# Altium PCB CH32V003F4P6-R0-1v1.PcbDoc
Units mil, origin at the board's own origin, x right, y up, seen from the top; angles counter-clockwise.
Board outline 1535.59 x 1780 mil, 2 copper layers (Top Layer, Bottom Layer); 31 components, 32 nets, 124 pads, 264 vias.
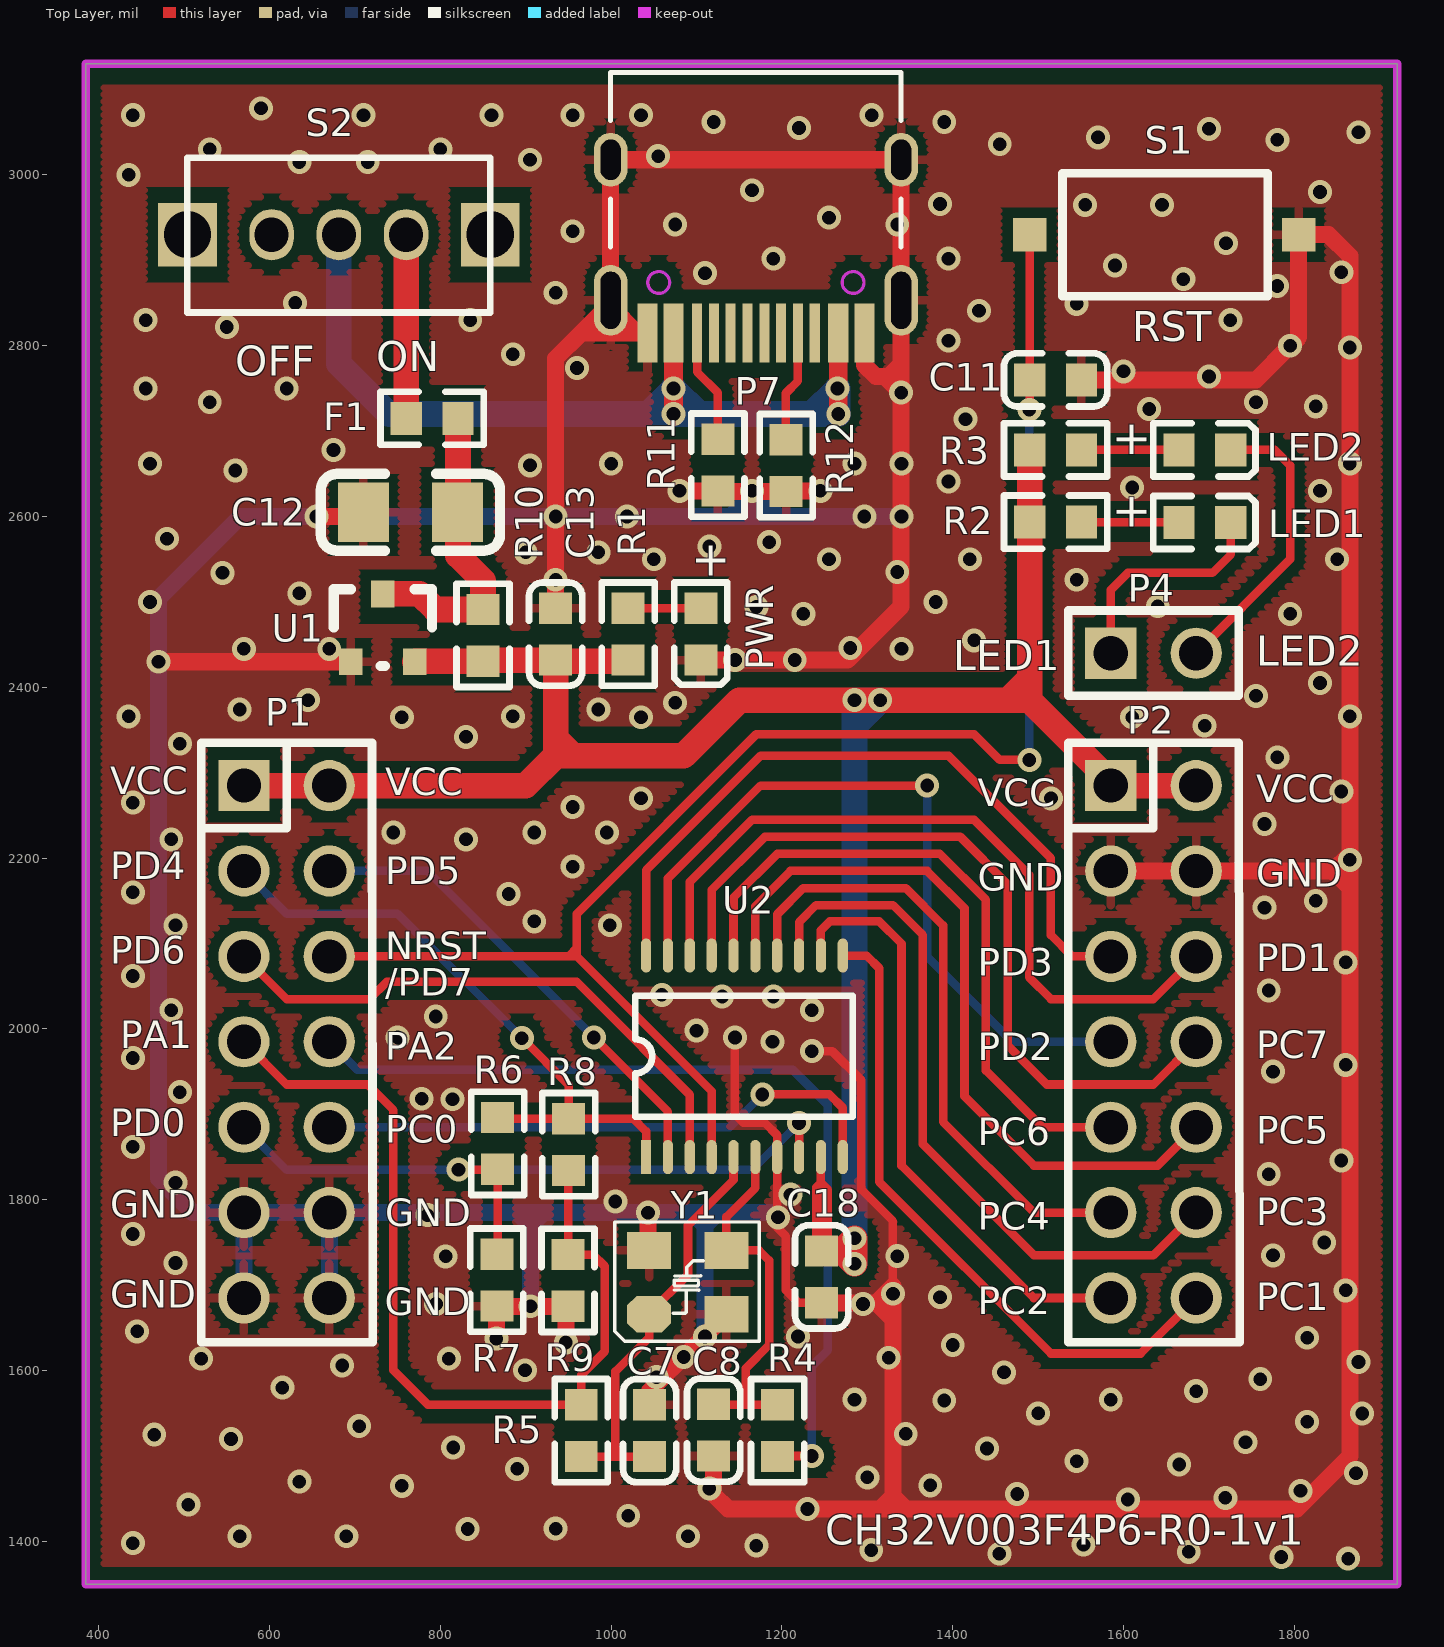
[diagram p0: Top Layer view]
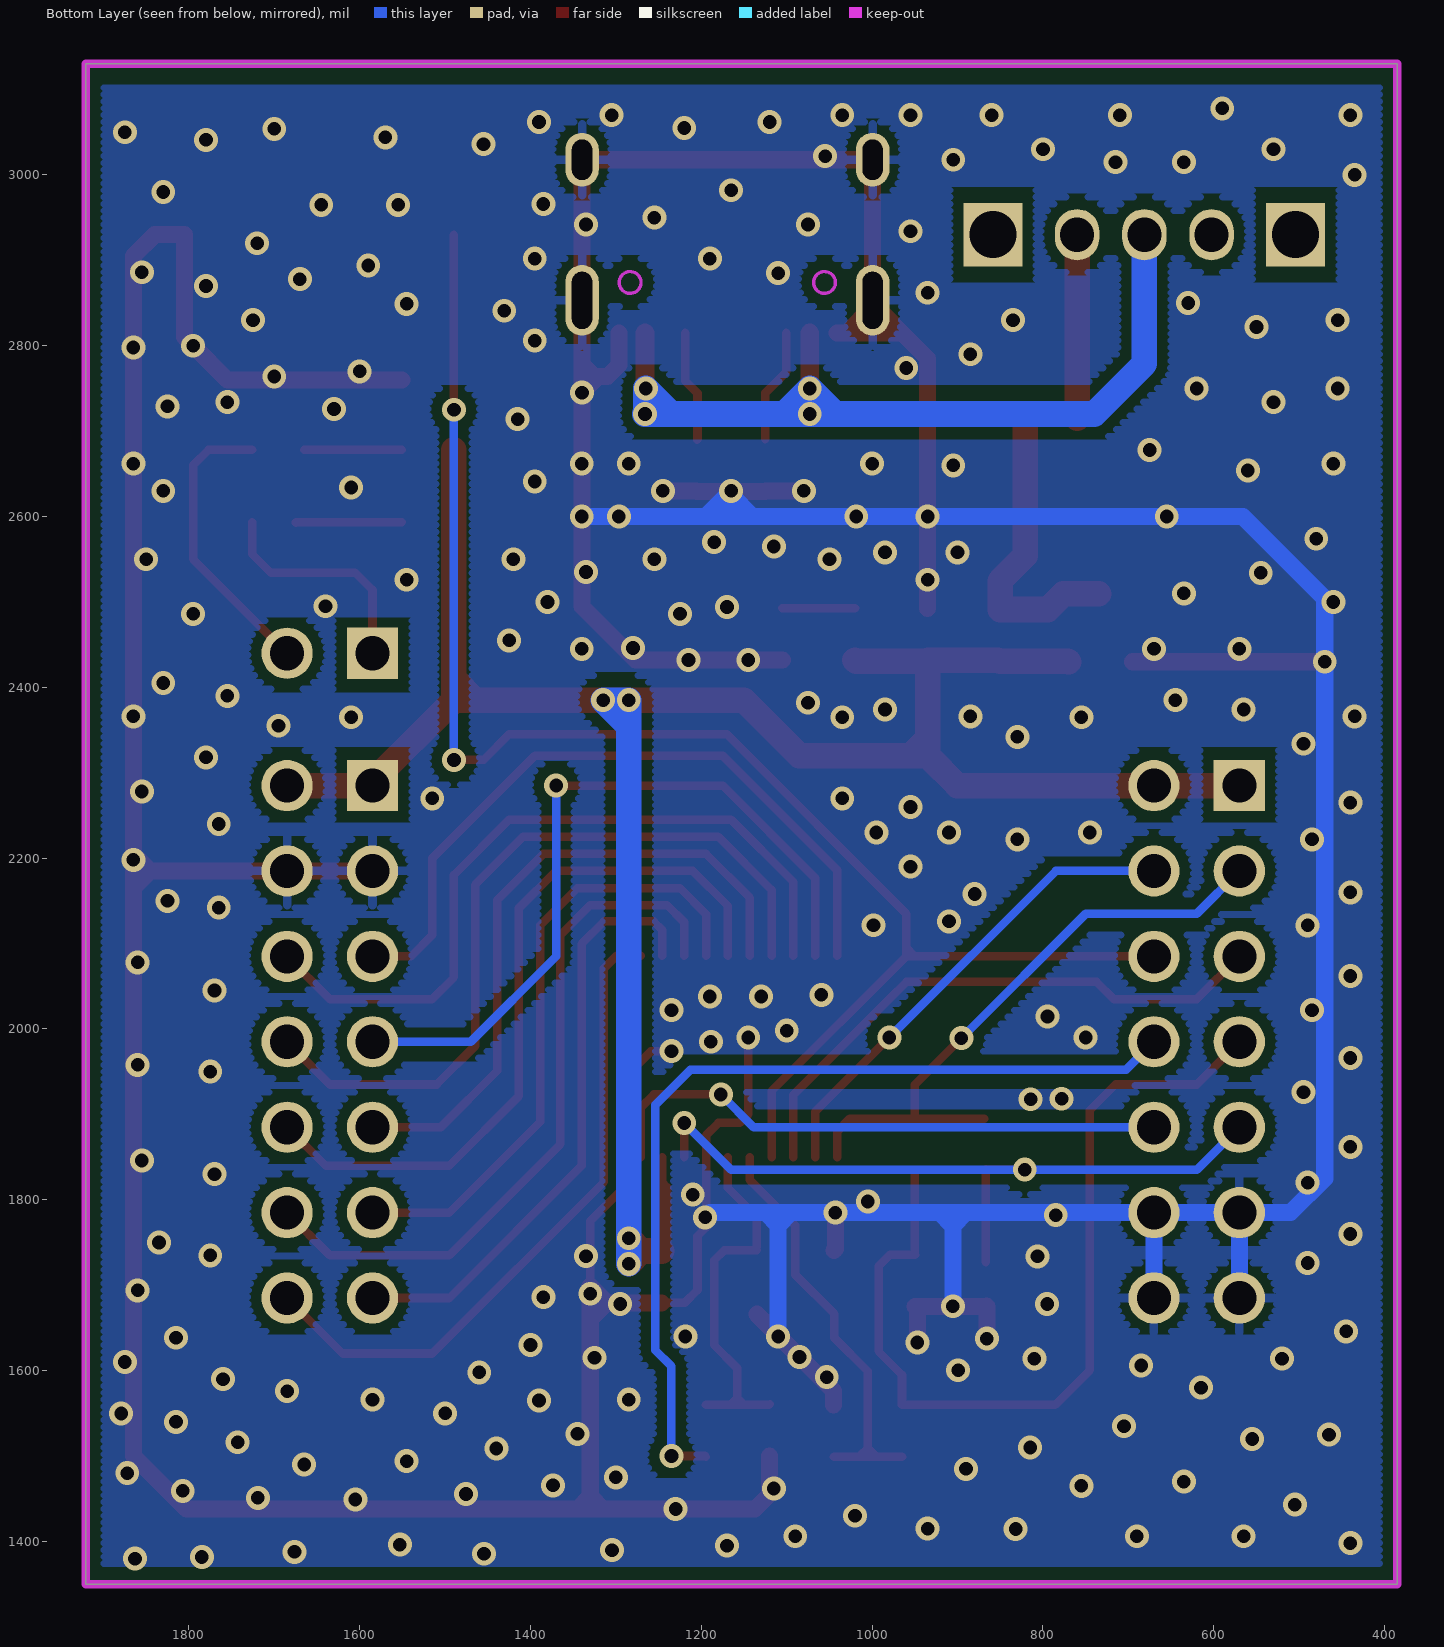
[diagram p1: Bottom Layer view, seen from below]

## Layer stack, top to bottom
Top Solder: solder mask 0.4, Solder Resist, Dk 3.5
Top Layer: signal copper 1.4
Dielectric 1: dielectric 12.6, FR-4, Dk 4.8
Bottom Layer: signal copper 1.4
Bottom Solder: solder mask 0.4, Solder Resist, Dk 3.5

## Board outline
385,1350 385,3130 1920.59,3130 1920.59,1350

## Design rules (kind name [scope] priority, off if disabled: settings)
Clearance Clearance_1 [InPolygon] p1: gap=12 ignorepadtopadclearanceinfootprint=FALSE
Clearance [All] p2: gap=6 ignorepadtopadclearanceinfootprint=FALSE
ComponentClearance [All] p1: gap=0 collisioncheckmode=3 verticalgap=0 showdistances=FALSE
DiffPairsRouting [All] p1: maxlimit=10 minlimit=6 mostfreqgap=8 toplayer_minwidth=6 toplayer_maxwidth=15 toplayer_prefwidth=8 bottomlayer_minwidth=6 bottomlayer_maxwidth=15 bottomlayer_prefwidth=8 maxuncoupledlength=500
PolygonConnect PolygonConnect_1 [IsVia] p1: connectstyle=Direct reliefconductorwidth=10 reliefentries=4 polygonreliefangle="90 Angle" airgapwidth=10
PolygonConnect [All] p2: connectstyle=Relief reliefconductorwidth=10 reliefentries=4 polygonreliefangle="90 Angle" airgapwidth=10
RoutingVias [All] p1: holewidth=16 width=28 viastyle="Through Hole" minholewidth=12 minwidth=24 maxholewidth=28 maxwidth=50
SolderMaskExpansion [All] p1: expansion=4 istentingtop=FALSE
Width [All] p1: maxlimit=100 minlimit=6 preferedwidth=10 minimp=50.000000 maximp=50.000000 favimp=50.000000
28 further rules are at their usual default settings.

## Components (designator, comment, footprint, x,y, rotation, side; value= is the part's Value field where it differs from the comment)
C7 "22pF" 0603_C 1045,1560 r270 top
C8 "22pF" 0603_C 1120,1500 r90 top
C11 "0.1uF" 0603_C 1550.63,2760 r180 top
C12 "10uF" 3216_C 820,2605 r0 top
C13 "2.2uF" 0603_C 935,2492.56 r270 top
C18 "0.1uF" 0603_C 1246.38,1679.37 r90 top value=15pF
F1 "500mA" 0603 760,2715 r0 top
LED1 "LED1   blue" 0603+ 1665,2593 r0 top
LED2 "LED2  blue" 0603+ 1665,2678 r0 top
P1 "Header 7X2" IDC14-2.54mm 570,2285 r0 top
P2 "Header 7X2" IDC14-2.54mm 1585,2285 r0 top locked
P4 "HEADER 2" SIP2-2.54mm 1585,2440 r270 top
P7 "TYPE-C" TYPE-C-Receptacle-2.0 1169.53,2815 r180 top
PWR "POWER  red" 0603+ 1105,2492.56 r270 top
R1 "1K" 0603 1020,2492.56 r270 top
R2 "1K" 0603 1490,2593.47 r0 top
R3 "1K" 0603 1490,2678 r0 top
R4 "0R" 0603 1195,1560 r270 top value=NC(0R)
R5 "0R" 0603 965,1499.37 r90 top value=NC(0R)
R6 "0R" 0603 867.18,1896.42 r270 top value=NC
R7 "0R" 0603 866.14,1736.18 r270 top value=NC
R8 "0R" 0603 950.34,1894.83 r270 top value=NC
R9 "0R" 0603 949.49,1735.85 r270 top value=NC
R10 "0R" 0603 850,2491.1 r270 top value=NC(0R)
R11 "0R" 0603 1125,2690.55 r270 top value=NC(5.1K)
R12 "0R" 0603 1205,2690 r270 top value=NC(5.1K)
S1 "NRST" SMD_6.1x3.65x2.5mm-KEY 1490.04,2930 r0 top
S2 "SW" SW1 681.26,2930 r0 top
U1 "6219P33M" SOT-23 695.2,2430 r0 top
U2 "CH32V003F4P6" TSSOP20 1040.9,1850 r0 top locked
Y1 "24MHz" XT3225 1044.45,1665.97 r0 top

## Footprints (in the part's own frame and the unit in brackets; to place one, negate y for a bottom-side part, rotate by r counter-clockwise, add the part's x,y. Pads: shape width x height; smd on the part's side, far side on the other; paste and mask are expansions set on the pad)
0603 [mm]
  rect 0.93x0.98 smd: 1(0,0) 2(1.54,0)
  silkscreen extent -0.76,-0.79 2.3,0.79
0603+ [mm]
  rect 0.93x0.98 smd: 1(0,0) 2(1.54,0)
  silkscreen extent -0.76,-0.79 2.27,0.79
0603_C [mm]
  rect 0.93x0.98 smd: 1(0,0) 2(1.54,0)
  silkscreen extent -0.76,-0.79 2.31,0.79
3216_C [mil]
  rect 60x70 smd: 1(0,0) 2(-110,0)
  silkscreen extent -160,-45 50,45
IDC14-2.54mm [mil]
  rect 60x60 hole 40: 1(0,0)
  round 60 hole 40: 2(100,0) 3(0,-100) 4(100,-100) 5(0,-200) 6(100,-200) 7(0,-300) 8(100,-300) 9(0,-400) 10(100,-400) 11(0,-500) 12(100,-500) 13(0,-600) 14(100,-600)
  silkscreen extent -50,-652 151,50
SIP2-2.54mm [mil]
  rect 60x60 hole 40: 1(0,0)
  round 60 hole 40: 2(0,100)
  silkscreen extent -50,-50 50,150
SMD_6.1x3.65x2.5mm-KEY [mm]
  rect 1x1 smd: 1(0,0) 2(8,0)
  silkscreen extent 0.98,-1.83 7.08,1.83
SOT-23 [mm]
  rect 0.7x0.8 smd: 1(0,0) 2(1.9,0) 3(0.95,2.02)
  silkscreen extent -0.51,-0.13 2.41,2.16
SW1 [mm]
  rect 1.75x1.9 hole 1.4: 0(-4.5,0) 0(4.5,0)
  oval 1.321x1.524 hole 1.016: 1(0,0) 2(-2,0) 3(2,0)
  silkscreen extent -4.51,-2.31 4.5,2.29
TSSOP20 [mil]
  rect 12x40 smd: 1(0,0)
  oval 12x40 smd: 2(25.6,0) 3(51.2,0) 4(76.8,0) 5(102.4,0) 6(128,0) 7(153.5,0) 8(179.1,0) 9(204.7,0) 10(230.3,0) 11(230.3,236) 12(204.7,236) 13(179.1,236) 14(153.5,236) 15(128,236) 16(102.4,236) 17(76.8,236) 18(51.2,236) 19(25.6,236) 20(0,236)
  silkscreen extent -13,47 242,189
TYPE-C-Receptacle-2.0 [mm]
  oval 1x2.1 hole 0.6 slot 1.7 at 90 deg: 0(-4.32,-0.97) 0(4.32,-0.97)
  oval 1x1.6 hole 0.6 slot 1.2 at 90 deg: 0(-4.32,-5.15) 0(4.32,-5.15)
  rect 0.6x1.75 smd: A1(-3.225,0) A4(-2.45,0) B1(3.225,0) B4(2.45,0)
  rect 0.3x1.75 smd: A5(-1.25,0) A6(-0.25,0) A7(0.25,0) A8(1.25,0) B5(1.75,0) B6(0.75,0) B7(-0.75,0) B8(-1.75,0)
  Keep-Out Layer circle w0.1: c2.89,-1.5 r0.325
  Keep-Out Layer circle w0.1: c-2.89,-1.5 r0.325
  silkscreen extent -4.32,-7.75 4.32,-2.55
XT3225 [mm]
  oct 1.3x1.1 smd: 1(0,0)
  rect 1.3x1.1 smd: 2(2.3,0) 3(2.3,1.9) 4(0,1.9)
  silkscreen extent -1.02,-0.8 3.27,2.74

## Part data
C7 C8 C12 C13: library part CAP, "Capacitor"
C11 C18: library part Cap, "Capacitor", LatestRevisionDate=17-Jul-2002, LatestRevisionNote="Re-released for DXP Platform.", PackageReference=RAD-0.3, Published=8-Jun-2000, Publisher="Altium Limited"
F1: library part FUSE1, "Fuse"
LED1 LED2 PWR: library part LED0, "Typical INFRARED GaAs LED", LatestRevisionDate=08-Jul-2005, LatestRevisionNote="Mech Layer 1 removed.", PackageReference=LED-0, Published=8-Jun-2000, Publisher="Altium Limited"
P1 P2: "Header, 7-Pin, Dual row", LatestRevisionDate=17-Jul-2002, LatestRevisionNote="Re-released for DXP Platform.", Publisher="Altium Limited"
P4: "Header, 2-Pin"
P7: library part TYPE-C1
R1 R2 R3 R4 R5 R6 R7 R8 R9 R10 R11 R12: library part "Res Semi", "Semiconductor Resistor", LatestRevisionDate=17-Jul-2002, LatestRevisionNote="Re-released for DXP Platform.", PackageReference=AXIAL-0.5, Published=8-Jun-2000, Publisher="Altium Limited"
S1: library part KEY
U2: "RISC-V MCU, 48MHz"
Y1: library part XTAL, "Crystal Oscillator", LatestRevisionDate=17-Jul-2002, LatestRevisionNote="Re-released for DXP Platform.", PackageDescription="Crystal, Thru-Hole; 2 Leads; Body 3.1 x 8.2 mm (Dia.xH)", PackageReference=R38, Published=8-Jun-2000, Publisher="Altium Limited"

## Via types
v1: diameter 28, hole 16, Top Layer to Bottom Layer, tented both sides, 264 vias

## Nets (pads, with @x,y where several pads share a name; then routed paths per layer and width w, separated by ;. In a path a pad name is that pad's centre, name@x,y a point inside that pad or via, vN(x,y) a via of type N, cw(c..) or ccw(c..) an arc to the next point about the centre after c; other vN are vias at no path point)
+5V: P7.A4 P7.B4 S2.1 | length 1150.7
  Top Layer w22: v1(1073.07,2720) v1(1073.07,2750) P7.B4 ; v1(1265.98,2720) P7.A4
  Bottom Layer w30: S2.1 681.26,2778.74 740,2720 1043.07,2720 ; 1115,2720 1103.07,2720 ; 1043.07,2720 v1(1073.07,2750) ; 1043.07,2720 v1@1075,2720 ; v1(1073.07,2750) 1103.07,2720 ; v1(1073.07,2750) 1073.07,2721.93 v1@1075,2720 ; v1@1075,2720 1103.07,2720 ; 1103.07,2720 1235,2720 ; 1235,2720 v1(1265.98,2720) 1265,2720.98 v1(1265,2750) 1235,2720
GND: C7.1 C8.1 C11.1 C12.2 C13.1 C18.1 P1.11 P1.12 P1.13 P1.14 P2.3 P2.4 P7.0 P7.A1 P7.B1 PWR.2 R7.2 R9.2 R11.2 R12.2 S1.2 U1.1 U2.7 Y1.2 Y1.4 | length 9947.6
  Top Layer w10: v1(1145,1990) 1145,1900 1155,1890 1180,1890 1194.4,1875.6 U2.7 1194.4,1767.49 1204.45,1757.44 1204.45,1694.37 1219.45,1679.37 C18.1 ; v1(1235,1974) 1259,1974 1293,1940 1293,1812 1330,1775 1330,1698.74 v1(1330,1690)
  Top Layer w20: v1(470,2430) U1.1 ; v1(655,2600) C12.2@710,2600 ; v1(865.68,1637.36) 865.68,1675.08 R7.2 866.47,1675.22 R9.2 946.97,1672.7 v1(946.97,1632.82) ; C13.1 v1(935,2526) v1(935,2600) 935,2784.92 965.08,2815 ; P7.B1@1040.9,2815 1030,2815 ; v1(1043.07,1785) 1043.07,1742.16 Y1.4 ; C7.1 1045,1575.97 Y1.2 ; v1(1080,2630) 1124.92,2630 R11.2 1125.55,2629.37 R12.2 1205.63,2630 v1(1245,2630) ; PWR.2 v1(1215,2431.93) 1276.93,2431.93 1339.61,2494.61 v1(1339.61,2745) ; C8.1 1120,1455 1137,1438 v1(1230,1438) 1315,1438 ; C18.1 1310.63,1679.37 ; P7.A1 1296.5,2777.5 1310,2764 1325,2764 ; v1(1330,1690) 1330,1675 ; v1@1330,1698.74 1310.63,1679.37 ; C11.1 1755,2760 v1(1795,2800) 1805,2810 S1.2 1840,2930 1865,2905 v1(1865,2798) v1(1865,2662) v1(1865,2366) v1@1865,2205 ; P2.3 P2.4 1845,2185 ; 965.08,2815 P7.0@985.08,2835 ; 965.08,2815 P7.0@990,2815 ; P7.0@985.08,2835 P7.0@999.45,2849.37 ; P7.0@985.08,2835 985.08,2819.92 P7.0@990,2815 ; P7.0@990,2815 P7.0@1003.82,2815 ; P7.0@999.45,2845.55 P7.0@999.45,2849.37 ; P7.0@999.45,2845.55 999.45,2819.37 P7.0@1003.82,2815 ; P7.0@999.45,2845.55 1030,2815 ; P7.0@999.45,2849.37 999.45,2853.19 999.45,3017.76 1339.61,3017.76 1339.61,2853.19 1339.61,2778.61 ; P7.0@1003.82,2815 1030,2815 ; 1310.63,1679.37 1330,1660 ; 1310.63,1679.37 1325.63,1679.37 1330,1675 ; 1315,1438 1325,1438 ; 1315,1438 1330,1453 ; 1325,1438 1345,1438 ; 1325,1438 1330,1443 1330,1453 ; 1325,2764 1339.61,2778.61 ; 1325,2764 1333.61,2764 1339.61,2770 ; 1325,2764 1325,2759.61 v1(1339.61,2745) ; 1330,1453 1330,1660 ; 1330,1453 1345,1438 ; 1330,1660 1330,1675 ; v1(1339.61,2745) 1339.61,2770 ; 1339.61,2770 1339.61,2778.61 ; 1345,1438 1803,1438 1865,1500 1865,2165 ; 1845,2185 v1@1865,2205 ; 1845,2185 1865,2165 ; 1845,2185 1860,2185 1865,2180 ; 1865,2165 1865,2180 ; 1865,2180 v1(1865,2198) v1@1865,2205
  Bottom Layer w20: P1.13 P1.11 510,1785 470,1825 v1(470,2430) 470,2504 566,2600 v1(655,2600) v1(935,2600) v1(1018.54,2600) 1140,2600 ; P1.11@590,1785 P1.12 ; P1.14 P1.12 ; v1(905.54,1675.3) 905.54,1769.46 ; 924.38,1785 921.08,1785 ; v1(1110,1640) 1110,1770 ; v1(1195.45,1779.49) 1189.94,1785 1125,1785 ; 1200,2600 1195,2600 ; v1@1339.61,2600 v1(1296.5,2600) 1195,2600 ; P1.12 890.01,1785 ; 890.01,1785 900,1785 ; 890.01,1785 905.54,1769.46 ; 900,1785 921.08,1785 ; 900,1785 905.54,1779.46 905.54,1769.46 ; 905.54,1769.46 921.08,1785 ; 921.08,1785 v1(1043.07,1785) 1095,1785 ; 1095,1785 1110,1785 ; 1095,1785 1110,1770 ; 1110,1770 1125,1785 ; 1110,1770 1110,1785 ; 1110,1785 1125,1785 ; 1140,2600 1165,2600 ; 1140,2600 v1@1165,2625 ; 1165,2600 1195,2600 ; 1165,2600 v1@1165,2625 ; v1@1165,2625 v1(1165,2630) 1195,2600
  other v1: 1862.99,1379.78 1784.74,1381.77 1454.49,1385.53 1676.27,1387.72 1304.61,1389.75 1170,1395 1553,1396.14 440,1398 565,1406 690,1406 1090,1406 831.93,1414.54 935,1415 1020,1430 505,1443 1605,1449 1719.21,1451.05 1475.44,1455.59 1807.14,1459.18 1115,1462 755,1465 1373.65,1465.58 635,1470 1300,1475 1872.16,1479.87 890,1485 1665,1490 1545,1494 1440,1508.76 815,1510 1742.85,1516.08 555,1520 465,1525 1345,1526 705,1535 1815,1540 1500,1550 1879.34,1549.67 1390,1565 1285,1566 1585,1566 1685,1575.97 615,1580 1760,1590 1053.15,1592.31 1460,1598 899.22,1600.41 685,1606 1875,1610 520,1614 810,1614 1325,1615 1085,1615.97 1400,1630 1815,1638.45 1218.74,1640 445,1646 795,1678 1295,1678 1385,1686 1860,1694 490,1726 806.3,1733.77 1335,1734 1775,1735 1835,1750 440,1760 785,1782 1005,1798 1210,1806 490,1820 1770,1830 1855,1846 440,1862 778.13,1918.27 814.34,1917.71 495,1926 1775,1950 1860,1958 440,1966 1188.85,1985 750,1990 1100,1998 794.64,2014.57 485,2022 1235,2022 1130,2038 1190,2038 1059.4,2040 1770,2045 440,2062 1860,2078 490,2121.26 998.45,2121.42 910,2126 1765,2142 1825,2150 880,2158 440,2160 955,2190 485,2222 830,2222 745,2230 910,2230 995,2230 1765,2240 955,2260 440,2265 1035,2270 1515,2270 1855,2278 1780,2318 495,2334 830,2342 1695,2355 755,2365 1035,2365 1610,2365 435,2366 885,2366 565,2374 985,2374 1075,2382 645,2385 1755,2390 1830,2405 1145,2431.93 570,2445 670,2445 1340,2445 1280,2446 1425,2455 1225,2486 1795,2486 1170,2494 1640,2495 460,2500 1380,2500 635,2510 1545,2526 545,2534 1335,2535 1050,2550 1255,2550 1420,2550 1850,2550 900,2558 985,2558 1115,2565 1185,2570 480,2574 1340,2600 1830,2630 1610,2634 1395,2641 560,2654 905,2660 460,2662 1000,2662 1285,2662 1340,2662 675,2678 1415,2714 1630,2726 1825,2729 530,2734 1755,2734 455,2750 620,2750 1700,2764 1600,2770 960,2774 885,2790 1395,2806 550,2822 455,2830 835,2830 1725,2830 1430.69,2841 1545,2849 630,2850 935,2862 1779.96,2869.96 1670,2878 1110,2885 1855,2886 1590,2894 1190,2902 1395,2902 1720,2920 955,2934 1075,2942 1335,2942 1255,2950 1555,2965 1645,2965 1385,2966 1830,2980 1165,2982 435,3000 635,3015 715,3015 905,3017.76 1055,3022 530,3030 800,3030 1455,3036 1780,3041 1570,3044 1875,3050 1700,3054 1220,3055 1120,3062 1390,3062 440,3070 710,3070 860,3070 955,3070 1035,3070 1305,3070 590,3078
LED1: LED1.2 P4.1 | length 269.2
  Top Layer w10: P4.1 1585,2514 1605,2534 1704,2534 1725.63,2555.63 LED1.2
LED2: LED2.2 P4.2 | length 342.4
  Top Layer w10: P4.2 1795,2550 1795,2660 1777,2678 LED2.2
NetC12_1: C12.1 F1.2 R10.1 U1.3 | length 360.5
  Top Layer w30: U1.3@735,2509.53 775.94,2509.53 794.37,2491.1 R10.1 850,2525 820.63,2554.37 C12.1@820.63,2600.63 ; C12.1@820,2600 C12.1@820.63,2600.63 ; C12.1 C12.1@820.63,2604.37 ; F1.2 C12.1@820.63,2604.37 ; C12.1@820.63,2600.63 C12.1@820.63,2604.37
NetF1_1: F1.1 S2.3 | length 215
  Top Layer w30: F1.1 S2.3
NetLED1_1: LED1.1 R2.2 | length 124.6
  Top Layer w10: R2.2 1674.53,2593.47 LED1.1@1675,2593
NetLED2_1: LED2.1 R3.2 | length 114.4
  Top Layer w10: R3.2 LED2.1
NetP7_A5: P7.A5 R12.1 | length 131.1
  Top Layer w10: R12.1 1204.45,2690.55 1204.45,2744.45 1218.74,2758.74 P7.A5
NetP7_B5: P7.B5 R11.1 | length 134.5
  Top Layer w10: P7.B5 1100.63,2769.35 1125,2744.98 R11.1
NetPWR_1: PWR.1 R1.1 | length 85
  Top Layer w10: R1.1 PWR.1
NRST: C11.2 P1.6 S1.1 U2.4 | length 1898.5
  Top Layer w10: P1.6 950,2085 ; U2.4 1117.7,1927.3 960,2085 ; v1(1489.64,2315) 1455,2315 1425,2345 1170,2345 960,2135 960,2095 ; v1@1490.04,2725 S1.1 ; 950,2085 960,2085 ; 950,2085 960,2095 ; 960,2085 960,2095
  Bottom Layer w10: v1(1489.64,2315) v1(1489.64,2725)
PA1: P1.7 R5.2 R8.2 R9.1 | length 1070.1
  Top Layer w10: P1.7 620,1935 715,1935 745,1905 745,1600.47 785.47,1560 R5.2 965,1595 992.47,1622.47 992.47,1722.16 978.78,1735.85 R9.1@950,1735.85 ; R9.1 R9.1@950,1735.85 ; R8.2 950,1833.87 R9.1@950,1735.85
PA2: P1.8 R4.2 | length 1073.5
  Top Layer w10: R4.2 1195.63,1500 v1(1235,1500)
  Bottom Layer w10: P1.8 702.7,1952.3 1212.7,1952.3 1253.7,1911.3 1253.7,1623.7 1235,1605 v1(1235,1500)
PC0: P1.10 U2.10 | length 681.3
  Top Layer w10: v1(1177.08,1923.34) 1255.55,1923.34 1271.2,1907.69 U2.10
  Bottom Layer w10: P1.10 1138.74,1885 v1(1177.08,1923.34)
PC1: P2.14 U2.11 | length 780.2
  Top Layer w10: U2.11 1299,2086 1314,2071 1314,1821 1515,1620 1620,1620 P2.14
PC2: P2.13 U2.12 | length 708.3
  Top Layer w10: U2.12 1245.6,2115.6 1256,2126 1314,2126 1340,2100 1340,1840 1495,1685 P2.13
PC3: P2.12 U2.13 | length 846.3
  Top Layer w10: U2.13 1220,2125 1240,2145 1330,2145 1365,2110 1365,1865 1495,1735 1635,1735 P2.12
PC4: P2.11 U2.14 | length 743.8
  Top Layer w10: U2.14 1194.4,2134.4 1225,2165 1345,2165 1388.74,2121.26 1388.74,1891.26 1495,1785 P2.11
PC5: P2.10 U2.15 | length 881.4
  Top Layer w10: U2.15 1168.9,2143.9 1210,2185 1370,2185 1413.74,2141.26 1413.74,1921.26 1495,1840 1640,1840 P2.10
PC6: P2.9 U2.16 | length 780.4
  Top Layer w10: U2.16 1143.3,2153.85 1194.45,2205 1385,2205 1438.74,2151.26 1438.74,1951.26 1505,1885 P2.9
PC7: P2.8 U2.17 | length 921.2
  Top Layer w10: U2.17 1117.7,2162.7 1180,2225 1408.74,2225 1464.64,2169.1 1464.64,1980.36 1510,1935 1635,1935 P2.8
PD0: P1.9 R6.2 R7.1 U2.8 | length 888.8
  Top Layer w10: v1(821.29,1835.26) 866.65,1835.26 R6.2 R7.1@867.18,1726.6 ; U2.8 v1(1220,1890)
  Bottom Layer w10: P1.9 620,1835 1165,1835 v1(1220,1890)
PD1: P2.6 U2.18 | length 887.2
  Top Layer w10: U2.18 1092.1,2172.1 1165,2245 1425,2245 1489.64,2180.36 1489.64,2060.36 1515,2035 1635,2035 P2.6
PD2: P2.7 U2.19 | length 895.4
  Top Layer w10: U2.19 1066.5,2176.5 1175,2285 v1(1370,2285)
  Bottom Layer w10: v1(1370,2285) 1370,2085 1470,1985 P2.7
PD3: P2.5 U2.20 | length 849.6
  Top Layer w10: U2.20 1040.9,2185.9 1175,2320 1395,2320 1515,2200 1515,2110 1540,2085 P2.5
PD4: P1.3 R6.1 R8.1 U2.1 | length 732
  Top Layer w10: R6.1@868.77,1894.83 R8.1 ; v1(895.52,1989.3) 950.34,1934.49 R8.1 ; U2.1 1040.9,1880.02 1026.09,1894.83 R8.1
  Bottom Layer w10: P1.3 620,2135 749.83,2135 v1(895.52,1989.3)
PD5: P1.4 U2.2 | length 566.5
  Top Layer w10: v1(979.84,1990) 1066.5,1903.34 U2.2
  Bottom Layer w10: P1.4 784.84,2185 v1(979.84,1990)
PD6: P1.5 U2.3 | length 678.8
  Top Layer w10: P1.5 620,2035 717.09,2035 737.22,2055.12 959.88,2055.12 980,2035 1092.1,1922.9 U2.3
VCC: C13.2 C18.2 P1.1 P1.2 P2.1 P2.2 R1.2 R2.1 R3.1 R10.2 U1.2 U2.9 | length 3024.8
  Top Layer w10: U2.9 1245.6,1820 ; C18.2@1245.6,1740.78 1240,1746.38 1240,1814.4 1245.6,1820 ; C18.2@1245.6,1740.78 1245.6,1820 ; C18.2@1245.6,1740.78 C18.2 1253.7,1747.32 1253.7,1811.9 1245.6,1820
  Top Layer w30: P1.1 P1.2 900,2285 935,2320 ; U1.2 770.47,2430.47 R10.2 ; R10.2@853.07,2431.93 C13.2 ; R1.2 1018.54,2430.47 935,2430.47 935,2340 ; C18.2 1270,1740 ; R3.1 R2.1 1490,2410 ; P2.2 P2.1 1585,2289.68 1490,2384.68 ; 935,2320 955,2320 ; 935,2320 935,2340 ; 935,2340 955,2320 ; 955,2320 1085,2320 1150,2385 v1(1285,2385) v1(1315,2385) 1465,2385 ; 1270,1740 v1(1285,1755) v1(1285,1725) 1270,1740 ; 1465,2385 1489.68,2385 1490,2384.68 ; 1465,2385 1490,2410 ; 1490,2384.68 1490,2410
  Bottom Layer w30: v1(1285,1725) v1(1285,1755) 1285,2355 ; 1285,2355 v1(1315,2385) v1(1285,2385) 1285,2355
XI: C7.2 R5.1 U2.5 Y1.1 | length 516.2
  Top Layer w10: R5.1 995,1499.37 ; C7.2 1015,1499.37 ; U2.5 1143.3,1823.3 1090,1770 1090,1712.32 1044.45,1666.77 Y1.1 1044.45,1638.45 1005,1599 1005,1509.37 ; 995,1499.37 1005,1499.37 ; 995,1499.37 1005,1509.37 ; 1005,1499.37 1015,1499.37 ; 1005,1499.37 1005,1509.37 ; 1005,1509.37 1015,1499.37
XO: C8.2 R4.1 U2.6 Y1.3 | length 456.1
  Top Layer w10: C8.2 1120.63,1560 1150,1560 ; Y1.3 1173.22,1740.78 1185,1729 1185,1630 1157.82,1602.82 1157.82,1567.82 ; Y1.3@1135,1744.8 1135,1780 1168.9,1813.9 U2.6 ; 1170,1560 1165.63,1560 ; R4.1 1165.63,1560 ; 1150,1560 1157.82,1560 ; 1150,1560 1157.82,1567.82 ; 1157.82,1560 1165.63,1560 ; 1157.82,1560 1157.82,1567.82 ; 1157.82,1567.82 1165.63,1560
pads on no net: P7.A6 P7.A7 P7.A8 P7.B6 P7.B7 P7.B8 S2.0 S2.2

## Polygon pours and split planes (outlines as drawn)
GND on Bottom Layer "Bottom Layer-GND" (hatched Horizontal grid 8 track 8, remove dead copper, pour order 2): 385,3130 1920.59,3130 1920.59,1350 385,1350
GND on Top Layer "Top Layer-GND" (hatched Horizontal grid 8 track 8, remove dead copper, pour order 0): 385.39,3130 1920.59,3130 1920.59,1350 385,1350

## Keep-outs
Keep-Out Layer:
  the board outline again, w10

## Silkscreen, mask and mechanical layers (free items; w line width, h text height)
Top Overlay:
  text "RST" at 1610,2805 h35
  text "ON" at 725,2770 h35
  text "OFF" at 560,2765 h35
  text "LED2" at 1755.63,2425 h35
  text "LED1" at 1400.8,2420.18 h35
  text "VCC" at 413.55,2274.66 h32
  text "VCC" at 735.49,2273.72 h32
  text "VCC" at 1755.16,2265.74 h32
  text "VCC" at 1429.25,2260.8 h32
  text "PD4" at 413.55,2175.49 h32
  text "PD5" at 735.49,2169.72 h32
  text "GND" at 1755.16,2166.58 h32
  text "GND" at 1429.25,2161.63 h32
  text "NRST" at 735.49,2081.72 h32
  text "PD6" at 413.55,2076.32 h32
  text "PD1" at 1755.16,2067.41 h32
  text "PD3" at 1429.25,2062.46 h32
  text "/PD7" at 735.49,2038.72 h32
  text "PA1" at 425.21,1977.16 h32
  text "PC7" at 1755.16,1965.74 h32
  text "PA2" at 735.49,1963.72 h32
  text "PD2" at 1429.25,1963.3 h32
  text "PD0" at 413.55,1874.66 h32
  text "PC0" at 735.49,1867.06 h32
  text "PC5" at 1755.16,1865.74 h32
  text "PC6" at 1429.25,1864.13 h32
  text "GND" at 413.55,1778.82 h32
  text "PC3" at 1755.16,1769.91 h32
  text "GND" at 735.49,1768.72 h32
  text "PC4" at 1429.25,1764.96 h32
  text "GND" at 413.55,1673.82 h32
  text "PC1" at 1755.16,1670.74 h32
  text "PC2" at 1429.25,1665.8 h32
  text "GND" at 734.99,1664.7 h32
  text "CH32V003F4P6-R0-1v1" at 1250.58,1396.28 h35
Mechanical 1:
  the board outline again, w10

## Text inside footprints (layer, text, board x,y; h text height)
LED1: Top Overlay "+" at 1626.92,2582.01 h40 r90
LED2: Top Overlay "+" at 1626.92,2667.01 h40 r90
PWR: Top Overlay "+" at 1094.01,2530.63 h40